# Altium PCB TFT_Adapter_Board_拼版.PcbDoc (part 2 of 9)
Units mm, origin at the board's own origin, x right, y up, seen from the top; angles counter-clockwise.
Board outline 137 x 166.56 mm, 2 copper layers (Top Layer, Bottom Layer); 80 components, 32 nets, 2615 pads, 0 vias.
Unrouted connection lines stored in the file: 1248.
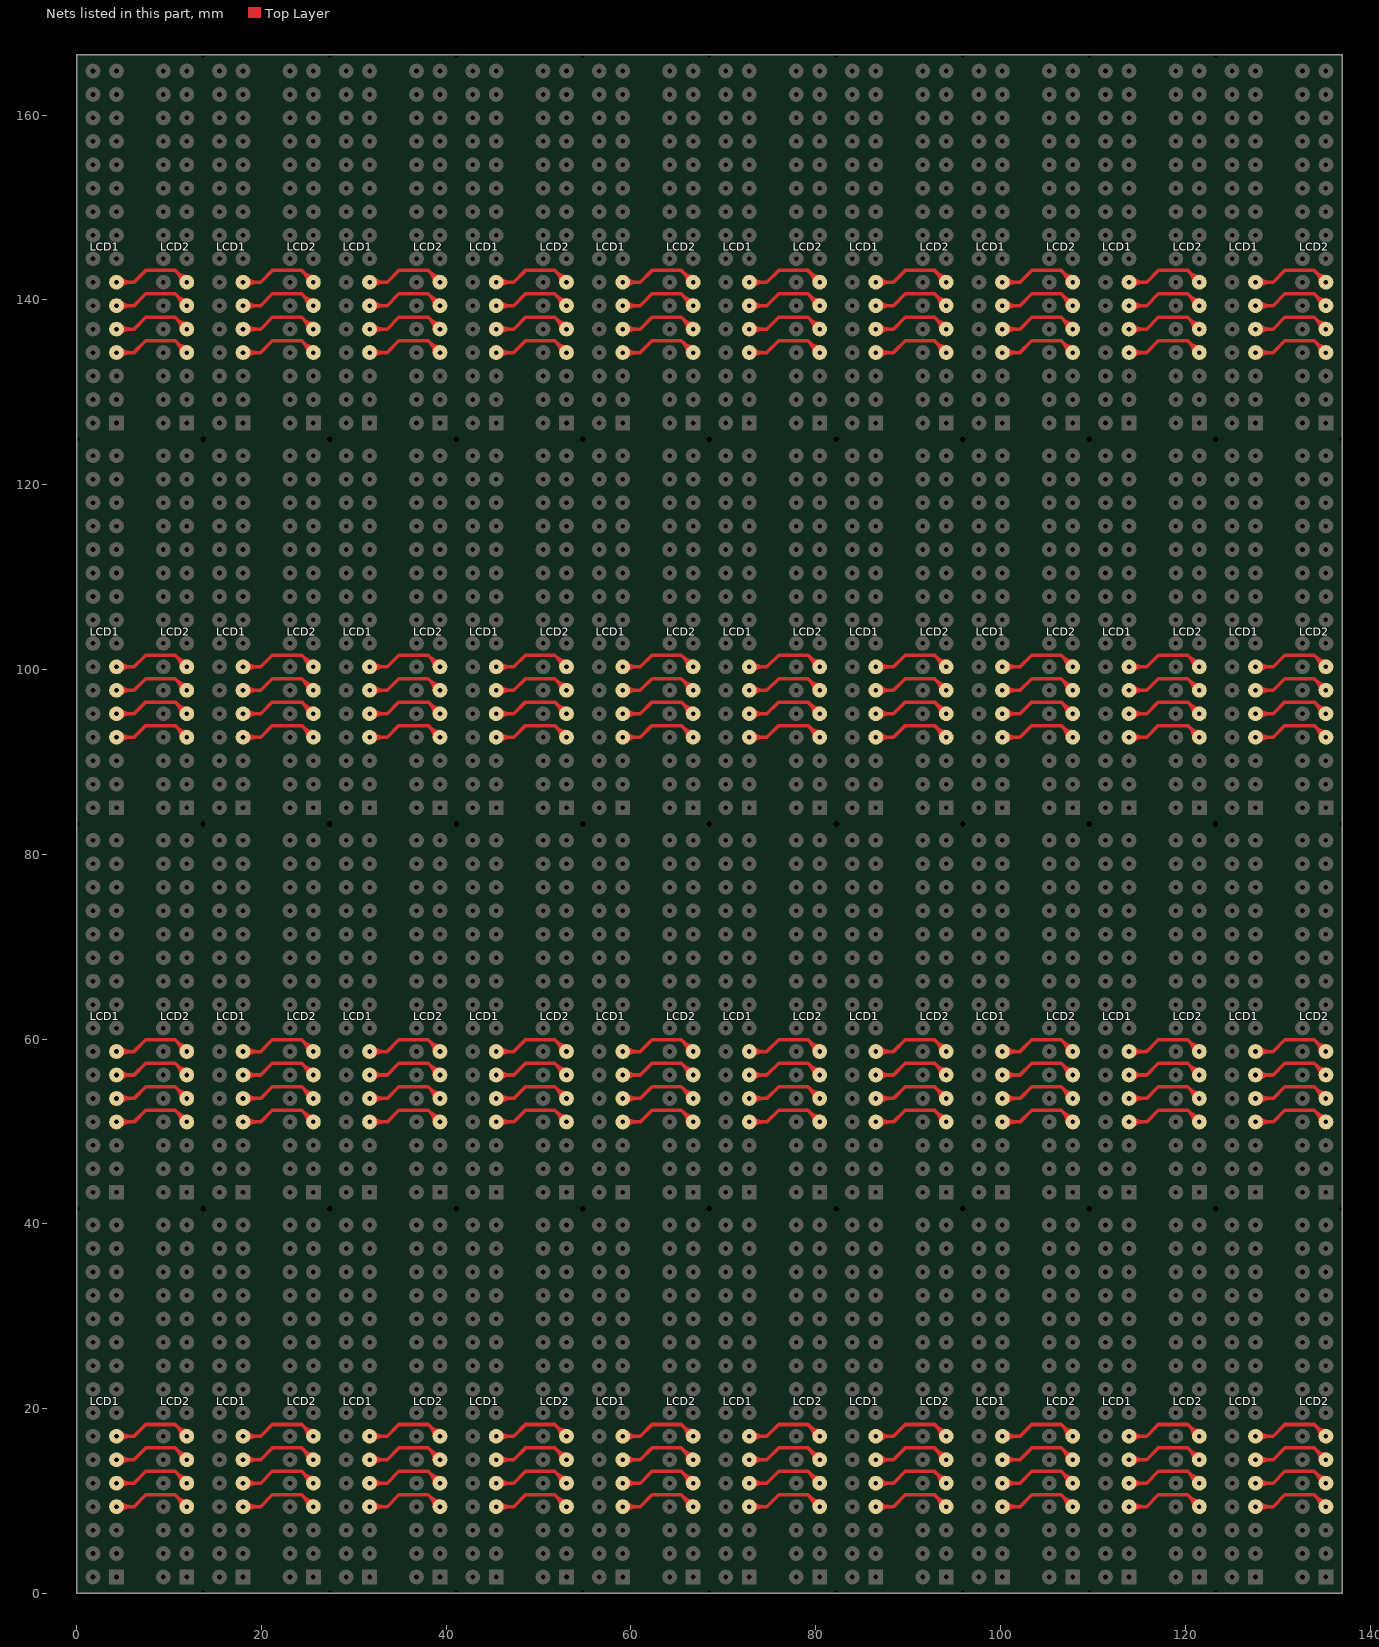
[diagram p2: the nets of this part, all layers, seen from the top]

## Nets (pads, with @x,y where several pads share a name; then routed paths per layer and width w, separated by ;. In a path a pad name is that pad's centre, name@x,y a point inside that pad or via, vN(x,y) a via of type N, cw(c..) or ccw(c..) an arc to the next point about the centre after c; other vN are vias at no path point) (continued)
NetLCD1_4: LCD1.4 LCD2.4 | length 531.8
  Top Layer w0.381: LCD1.4@4.31,9.39 6.215,9.39 7.485,10.66 10.66,10.66 LCD2.4@11.93,9.39 ; LCD1.4@4.31,51.03 6.215,51.03 7.485,52.3 10.66,52.3 LCD2.4@11.93,51.03 ; LCD1.4@4.31,92.67 6.215,92.67 7.485,93.94 10.66,93.94 LCD2.4@11.93,92.67 ; LCD1.4@4.31,134.31 6.215,134.31 7.485,135.58 10.66,135.58 LCD2.4@11.93,134.31 ; LCD1.4@4.741,8.959 cw(c5.781,7.919) 5.781,9.39 cw(c5.781,10.861) LCD1.4@4.741,9.821 ; LCD1.4@4.741,50.599 cw(c5.781,49.559) 5.781,51.03 cw(c5.781,52.501) LCD1.4@4.741,51.461 ; LCD1.4@4.741,92.239 cw(c5.781,91.199) 5.781,92.67 cw(c5.781,94.141) LCD1.4@4.741,93.101 ; LCD1.4@4.741,133.879 cw(c5.781,132.839) 5.781,134.31 cw(c5.781,135.781) LCD1.4@4.741,134.741 ; LCD2.4@11.321,9.39 ccw(c9.849,9.39) 10.89,10.43 ccw(c11.93,11.471) LCD2.4@11.93,9.999 ; LCD2.4@11.321,51.03 ccw(c9.849,51.03) 10.89,52.07 ccw(c11.93,53.111) LCD2.4@11.93,51.639 ; LCD2.4@11.321,92.67 ccw(c9.849,92.67) 10.89,93.71 ccw(c11.93,94.751) LCD2.4@11.93,93.279 ; LCD2.4@11.321,134.31 ccw(c9.849,134.31) 10.89,135.35 ccw(c11.93,136.391) LCD2.4@11.93,134.919 ; LCD1.4@18.01,9.39 19.915,9.39 21.185,10.66 24.36,10.66 LCD2.4@25.63,9.39 ; LCD1.4@18.01,51.03 19.915,51.03 21.185,52.3 24.36,52.3 LCD2.4@25.63,51.03 ; LCD1.4@18.01,92.67 19.915,92.67 21.185,93.94 24.36,93.94 LCD2.4@25.63,92.67 ; LCD1.4@18.01,134.31 19.915,134.31 21.185,135.58 24.36,135.58 LCD2.4@25.63,134.31 ; LCD1.4@18.441,8.959 cw(c19.481,7.919) 19.481,9.39 cw(c19.481,10.861) LCD1.4@18.441,9.821 ; LCD1.4@18.441,50.599 cw(c19.481,49.559) 19.481,51.03 cw(c19.481,52.501) LCD1.4@18.441,51.461 ; LCD1.4@18.441,92.239 cw(c19.481,91.199) 19.481,92.67 cw(c19.481,94.141) LCD1.4@18.441,93.101 ; LCD1.4@18.441,133.879 cw(c19.481,132.839) 19.481,134.31 cw(c19.481,135.781) LCD1.4@18.441,134.741 ; LCD2.4@25.02,9.39 ccw(c23.549,9.39) 24.59,10.43 ccw(c25.63,11.471) LCD2.4@25.63,9.999 ; LCD2.4@25.02,51.03 ccw(c23.549,51.03) 24.59,52.07 ccw(c25.63,53.111) LCD2.4@25.63,51.639 ; LCD2.4@25.02,92.67 ccw(c23.549,92.67) 24.59,93.71 ccw(c25.63,94.751) LCD2.4@25.63,93.279 ; LCD2.4@25.02,134.31 ccw(c23.549,134.31) 24.59,135.35 ccw(c25.63,136.391) LCD2.4@25.63,134.919 ; LCD1.4@31.71,9.39 33.615,9.39 34.885,10.66 38.06,10.66 LCD2.4@39.33,9.39 ; LCD1.4@31.71,51.03 33.615,51.03 34.885,52.3 38.06,52.3 LCD2.4@39.33,51.03 ; LCD1.4@31.71,92.67 33.615,92.67 34.885,93.94 38.06,93.94 LCD2.4@39.33,92.67 ; LCD1.4@31.71,134.31 33.615,134.31 34.885,135.58 38.06,135.58 LCD2.4@39.33,134.31 ; LCD1.4@32.141,8.959 cw(c33.181,7.919) 33.181,9.39 cw(c33.181,10.861) LCD1.4@32.141,9.821 ; LCD1.4@32.141,50.599 cw(c33.181,49.559) 33.181,51.03 cw(c33.181,52.501) LCD1.4@32.141,51.461 ; LCD1.4@32.141,92.239 cw(c33.181,91.199) 33.181,92.67 cw(c33.181,94.141) LCD1.4@32.141,93.101 ; LCD1.4@32.141,133.879 cw(c33.181,132.839) 33.181,134.31 cw(c33.181,135.781) LCD1.4@32.141,134.741 ; LCD2.4@38.72,9.39 ccw(c37.249,9.39) 38.29,10.43 ccw(c39.33,11.471) LCD2.4@39.33,9.999 ; LCD2.4@38.72,51.03 ccw(c37.249,51.03) 38.29,52.07 ccw(c39.33,53.111) LCD2.4@39.33,51.639 ; LCD2.4@38.72,92.67 ccw(c37.249,92.67) 38.29,93.71 ccw(c39.33,94.751) LCD2.4@39.33,93.279 ; LCD2.4@38.72,134.31 ccw(c37.249,134.31) 38.29,135.35 ccw(c39.33,136.391) LCD2.4@39.33,134.919 ; LCD1.4@45.41,9.39 47.315,9.39 48.585,10.66 51.76,10.66 LCD2.4@53.03,9.39 ; LCD1.4@45.41,51.03 47.315,51.03 48.585,52.3 51.76,52.3 LCD2.4@53.03,51.03 ; LCD1.4@45.41,92.67 47.315,92.67 48.585,93.94 51.76,93.94 LCD2.4@53.03,92.67 ; LCD1.4@45.41,134.31 47.315,134.31 48.585,135.58 51.76,135.58 LCD2.4@53.03,134.31 ; LCD1.4@45.841,8.959 cw(c46.881,7.919) 46.881,9.39 cw(c46.881,10.861) LCD1.4@45.841,9.821 ; LCD1.4@45.841,50.599 cw(c46.881,49.559) 46.881,51.03 cw(c46.881,52.501) LCD1.4@45.841,51.461 ; LCD1.4@45.841,92.239 cw(c46.881,91.199) 46.881,92.67 cw(c46.881,94.141) LCD1.4@45.841,93.101 ; LCD1.4@45.841,133.879 cw(c46.881,132.839) 46.881,134.31 cw(c46.881,135.781) LCD1.4@45.841,134.741 ; LCD2.4@52.42,9.39 ccw(c50.949,9.39) 51.99,10.43 ccw(c53.03,11.471) LCD2.4@53.03,9.999 ; LCD2.4@52.42,51.03 ccw(c50.949,51.03) 51.99,52.07 ccw(c53.03,53.111) LCD2.4@53.03,51.639 ; LCD2.4@52.42,92.67 ccw(c50.949,92.67) 51.99,93.71 ccw(c53.03,94.751) LCD2.4@53.03,93.279 ; LCD2.4@52.42,134.31 ccw(c50.949,134.31) 51.99,135.35 ccw(c53.03,136.391) LCD2.4@53.03,134.919 ; LCD1.4@59.11,9.39 61.015,9.39 62.285,10.66 65.46,10.66 LCD2.4@66.73,9.39 ; LCD1.4@59.11,51.03 61.015,51.03 62.285,52.3 65.46,52.3 LCD2.4@66.73,51.03 ; LCD1.4@59.11,92.67 61.015,92.67 62.285,93.94 65.46,93.94 LCD2.4@66.73,92.67 ; LCD1.4@59.11,134.31 61.015,134.31 62.285,135.58 65.46,135.58 LCD2.4@66.73,134.31 ; LCD1.4@59.541,8.959 cw(c60.581,7.919) 60.581,9.39 cw(c60.581,10.861) LCD1.4@59.541,9.821 ; LCD1.4@59.541,50.599 cw(c60.581,49.559) 60.581,51.03 cw(c60.581,52.501) LCD1.4@59.541,51.461 ; LCD1.4@59.541,92.239 cw(c60.581,91.199) 60.581,92.67 cw(c60.581,94.141) LCD1.4@59.541,93.101 ; LCD1.4@59.541,133.879 cw(c60.581,132.839) 60.581,134.31 cw(c60.581,135.781) LCD1.4@59.541,134.741 ; LCD2.4@66.12,9.39 ccw(c64.649,9.39) 65.69,10.43 ccw(c66.73,11.471) LCD2.4@66.73,9.999 ; LCD2.4@66.12,51.03 ccw(c64.649,51.03) 65.69,52.07 ccw(c66.73,53.111) LCD2.4@66.73,51.639 ; LCD2.4@66.12,92.67 ccw(c64.649,92.67) 65.69,93.71 ccw(c66.73,94.751) LCD2.4@66.73,93.279 ; LCD2.4@66.12,134.31 ccw(c64.649,134.31) 65.69,135.35 ccw(c66.73,136.391) LCD2.4@66.73,134.919 ; LCD1.4@72.81,9.39 74.715,9.39 75.985,10.66 79.16,10.66 LCD2.4@80.43,9.39 ; LCD1.4@72.81,51.03 74.715,51.03 75.985,52.3 79.16,52.3 LCD2.4@80.43,51.03 ; LCD1.4@72.81,92.67 74.715,92.67 75.985,93.94 79.16,93.94 LCD2.4@80.43,92.67 ; LCD1.4@72.81,134.31 74.715,134.31 75.985,135.58 79.16,135.58 LCD2.4@80.43,134.31 ; LCD1.4@73.241,8.959 cw(c74.281,7.919) 74.281,9.39 cw(c74.281,10.861) LCD1.4@73.241,9.821 ; LCD1.4@73.241,50.599 cw(c74.281,49.559) 74.281,51.03 cw(c74.281,52.501) LCD1.4@73.241,51.461 ; LCD1.4@73.241,92.239 cw(c74.281,91.199) 74.281,92.67 cw(c74.281,94.141) LCD1.4@73.241,93.101 ; LCD1.4@73.241,133.879 cw(c74.281,132.839) 74.281,134.31 cw(c74.281,135.781) LCD1.4@73.241,134.741 ; LCD2.4@79.82,9.39 ccw(c78.349,9.39) 79.39,10.43 ccw(c80.43,11.471) LCD2.4@80.43,9.999 ; LCD2.4@79.82,51.03 ccw(c78.349,51.03) 79.39,52.07 ccw(c80.43,53.111) LCD2.4@80.43,51.639 ; LCD2.4@79.82,92.67 ccw(c78.349,92.67) 79.39,93.71 ccw(c80.43,94.751) LCD2.4@80.43,93.279 ; LCD2.4@79.82,134.31 ccw(c78.349,134.31) 79.39,135.35 ccw(c80.43,136.391) LCD2.4@80.43,134.919 ; LCD1.4@86.51,9.39 88.415,9.39 89.685,10.66 92.86,10.66 LCD2.4@94.13,9.39 ; LCD1.4@86.51,51.03 88.415,51.03 89.685,52.3 92.86,52.3 LCD2.4@94.13,51.03 ; LCD1.4@86.51,92.67 88.415,92.67 89.685,93.94 92.86,93.94 LCD2.4@94.13,92.67 ; LCD1.4@86.51,134.31 88.415,134.31 89.685,135.58 92.86,135.58 LCD2.4@94.13,134.31 ; LCD1.4@86.941,8.959 cw(c87.981,7.919) 87.981,9.39 cw(c87.981,10.861) LCD1.4@86.941,9.821 ; LCD1.4@86.941,50.599 cw(c87.981,49.559) 87.981,51.03 cw(c87.981,52.501) LCD1.4@86.941,51.461 ; LCD1.4@86.941,92.239 cw(c87.981,91.199) 87.981,92.67 cw(c87.981,94.141) LCD1.4@86.941,93.101 ; LCD1.4@86.941,133.879 cw(c87.981,132.839) 87.981,134.31 cw(c87.981,135.781) LCD1.4@86.941,134.741 ; LCD2.4@93.52,9.39 ccw(c92.049,9.39) 93.09,10.43 ccw(c94.13,11.471) LCD2.4@94.13,9.999 ; LCD2.4@93.52,51.03 ccw(c92.049,51.03) 93.09,52.07 ccw(c94.13,53.111) LCD2.4@94.13,51.639 ; LCD2.4@93.52,92.67 ccw(c92.049,92.67) 93.09,93.71 ccw(c94.13,94.751) LCD2.4@94.13,93.279 ; LCD2.4@93.52,134.31 ccw(c92.049,134.31) 93.09,135.35 ccw(c94.13,136.391) LCD2.4@94.13,134.919 ; LCD1.4@100.21,9.39 102.115,9.39 103.385,10.66 106.56,10.66 LCD2.4@107.83,9.39 ; LCD1.4@100.21,51.03 102.115,51.03 103.385,52.3 106.56,52.3 LCD2.4@107.83,51.03 ; LCD1.4@100.21,92.67 102.115,92.67 103.385,93.94 106.56,93.94 LCD2.4@107.83,92.67 ; LCD1.4@100.21,134.31 102.115,134.31 103.385,135.58 106.56,135.58 LCD2.4@107.83,134.31 ; LCD1.4@100.641,8.959 cw(c101.681,7.919) 101.681,9.39 cw(c101.681,10.861) LCD1.4@100.641,9.821 ; LCD1.4@100.641,50.599 cw(c101.681,49.559) 101.681,51.03 cw(c101.681,52.501) LCD1.4@100.641,51.461 ; LCD1.4@100.641,92.239 cw(c101.681,91.199) 101.681,92.67 cw(c101.681,94.141) LCD1.4@100.641,93.101 ; LCD1.4@100.641,133.879 cw(c101.681,132.839) 101.681,134.31 cw(c101.681,135.781) LCD1.4@100.641,134.741 ; LCD2.4@107.22,9.39 ccw(c105.749,9.39) 106.79,10.43 ccw(c107.83,11.471) LCD2.4@107.83,9.999 ; LCD2.4@107.22,51.03 ccw(c105.749,51.03) 106.79,52.07 ccw(c107.83,53.111) LCD2.4@107.83,51.639 ; LCD2.4@107.22,92.67 ccw(c105.749,92.67) 106.79,93.71 ccw(c107.83,94.751) LCD2.4@107.83,93.279 ; LCD2.4@107.22,134.31 ccw(c105.749,134.31) 106.79,135.35 ccw(c107.83,136.391) LCD2.4@107.83,134.919 ; LCD1.4@113.91,9.39 115.815,9.39 117.085,10.66 120.26,10.66 LCD2.4@121.53,9.39 ; LCD1.4@113.91,51.03 115.815,51.03 117.085,52.3 120.26,52.3 LCD2.4@121.53,51.03 ; LCD1.4@113.91,92.67 115.815,92.67 117.085,93.94 120.26,93.94 LCD2.4@121.53,92.67 ; LCD1.4@113.91,134.31 115.815,134.31 117.085,135.58 120.26,135.58 LCD2.4@121.53,134.31 ; LCD1.4@114.341,8.959 cw(c115.381,7.919) 115.381,9.39 cw(c115.381,10.861) LCD1.4@114.341,9.821 ; LCD1.4@114.341,50.599 cw(c115.381,49.559) 115.381,51.03 cw(c115.381,52.501) LCD1.4@114.341,51.461 ; LCD1.4@114.341,92.239 cw(c115.381,91.199) 115.381,92.67 cw(c115.381,94.141) LCD1.4@114.341,93.101 ; LCD1.4@114.341,133.879 cw(c115.381,132.839) 115.381,134.31 cw(c115.381,135.781) LCD1.4@114.341,134.741 ; LCD2.4@120.92,9.39 ccw(c119.449,9.39) 120.49,10.43 ccw(c121.53,11.471) LCD2.4@121.53,9.999 ; LCD2.4@120.92,51.03 ccw(c119.449,51.03) 120.49,52.07 ccw(c121.53,53.111) LCD2.4@121.53,51.639 ; LCD2.4@120.92,92.67 ccw(c119.449,92.67) 120.49,93.71 ccw(c121.53,94.751) LCD2.4@121.53,93.279 ; LCD2.4@120.92,134.31 ccw(c119.449,134.31) 120.49,135.35 ccw(c121.53,136.391) LCD2.4@121.53,134.919 ; LCD1.4@127.61,9.39 129.515,9.39 130.785,10.66 133.96,10.66 LCD2.4@135.23,9.39 ; LCD1.4@127.61,51.03 129.515,51.03 130.785,52.3 133.96,52.3 LCD2.4@135.23,51.03 ; LCD1.4@127.61,92.67 129.515,92.67 130.785,93.94 133.96,93.94 LCD2.4@135.23,92.67 ; LCD1.4@127.61,134.31 129.515,134.31 130.785,135.58 133.96,135.58 LCD2.4@135.23,134.31 ; LCD1.4@128.041,8.959 cw(c129.081,7.919) 129.081,9.39 cw(c129.081,10.861) LCD1.4@128.041,9.821 ; LCD1.4@128.041,50.599 cw(c129.081,49.559) 129.081,51.03 cw(c129.081,52.501) LCD1.4@128.041,51.461 ; LCD1.4@128.041,92.239 cw(c129.081,91.199) 129.081,92.67 cw(c129.081,94.141) LCD1.4@128.041,93.101 ; LCD1.4@128.041,133.879 cw(c129.081,132.839) 129.081,134.31 cw(c129.081,135.781) LCD1.4@128.041,134.741 ; LCD2.4@134.62,9.39 ccw(c133.149,9.39) 134.19,10.43 ccw(c135.23,11.471) LCD2.4@135.23,9.999 ; LCD2.4@134.62,51.03 ccw(c133.149,51.03) 134.19,52.07 ccw(c135.23,53.111) LCD2.4@135.23,51.639 ; LCD2.4@134.62,92.67 ccw(c133.149,92.67) 134.19,93.71 ccw(c135.23,94.751) LCD2.4@135.23,93.279 ; LCD2.4@134.62,134.31 ccw(c133.149,134.31) 134.19,135.35 ccw(c135.23,136.391) LCD2.4@135.23,134.919
NetLCD1_5: LCD1.5 LCD2.5 | length 531.8
  Top Layer w0.381: LCD1.5@4.31,11.93 6.215,11.93 7.485,13.2 10.66,13.2 LCD2.5@11.93,11.93 ; LCD1.5@4.31,53.57 6.215,53.57 7.485,54.84 10.66,54.84 LCD2.5@11.93,53.57 ; LCD1.5@4.31,95.21 6.215,95.21 7.485,96.48 10.66,96.48 LCD2.5@11.93,95.21 ; LCD1.5@4.31,136.85 6.215,136.85 7.485,138.12 10.66,138.12 LCD2.5@11.93,136.85 ; LCD1.5@4.741,11.499 cw(c5.781,10.459) 5.781,11.93 cw(c5.781,13.401) LCD1.5@4.741,12.361 ; LCD1.5@4.741,53.139 cw(c5.781,52.099) 5.781,53.57 cw(c5.781,55.041) LCD1.5@4.741,54.001 ; LCD1.5@4.741,94.779 cw(c5.781,93.739) 5.781,95.21 cw(c5.781,96.681) LCD1.5@4.741,95.641 ; LCD1.5@4.741,136.419 cw(c5.781,135.379) 5.781,136.85 cw(c5.781,138.321) LCD1.5@4.741,137.281 ; LCD2.5@11.321,11.93 ccw(c9.849,11.93) 10.89,12.97 ccw(c11.93,14.011) LCD2.5@11.93,12.539 ; LCD2.5@11.321,53.57 ccw(c9.849,53.57) 10.89,54.61 ccw(c11.93,55.651) LCD2.5@11.93,54.179 ; LCD2.5@11.321,95.21 ccw(c9.849,95.21) 10.89,96.25 ccw(c11.93,97.291) LCD2.5@11.93,95.819 ; LCD2.5@11.321,136.85 ccw(c9.849,136.85) 10.89,137.89 ccw(c11.93,138.931) LCD2.5@11.93,137.459 ; LCD1.5@18.01,11.93 19.915,11.93 21.185,13.2 24.36,13.2 LCD2.5@25.63,11.93 ; LCD1.5@18.01,53.57 19.915,53.57 21.185,54.84 24.36,54.84 LCD2.5@25.63,53.57 ; LCD1.5@18.01,95.21 19.915,95.21 21.185,96.48 24.36,96.48 LCD2.5@25.63,95.21 ; LCD1.5@18.01,136.85 19.915,136.85 21.185,138.12 24.36,138.12 LCD2.5@25.63,136.85 ; LCD1.5@18.441,11.499 cw(c19.481,10.459) 19.481,11.93 cw(c19.481,13.401) LCD1.5@18.441,12.361 ; LCD1.5@18.441,53.139 cw(c19.481,52.099) 19.481,53.57 cw(c19.481,55.041) LCD1.5@18.441,54.001 ; LCD1.5@18.441,94.779 cw(c19.481,93.739) 19.481,95.21 cw(c19.481,96.681) LCD1.5@18.441,95.641 ; LCD1.5@18.441,136.419 cw(c19.481,135.379) 19.481,136.85 cw(c19.481,138.321) LCD1.5@18.441,137.281 ; LCD2.5@25.02,11.93 ccw(c23.549,11.93) 24.59,12.97 ccw(c25.63,14.011) LCD2.5@25.63,12.539 ; LCD2.5@25.02,53.57 ccw(c23.549,53.57) 24.59,54.61 ccw(c25.63,55.651) LCD2.5@25.63,54.179 ; LCD2.5@25.02,95.21 ccw(c23.549,95.21) 24.59,96.25 ccw(c25.63,97.291) LCD2.5@25.63,95.819 ; LCD2.5@25.02,136.85 ccw(c23.549,136.85) 24.59,137.89 ccw(c25.63,138.931) LCD2.5@25.63,137.459 ; LCD1.5@31.71,11.93 33.615,11.93 34.885,13.2 38.06,13.2 LCD2.5@39.33,11.93 ; LCD1.5@31.71,53.57 33.615,53.57 34.885,54.84 38.06,54.84 LCD2.5@39.33,53.57 ; LCD1.5@31.71,95.21 33.615,95.21 34.885,96.48 38.06,96.48 LCD2.5@39.33,95.21 ; LCD1.5@31.71,136.85 33.615,136.85 34.885,138.12 38.06,138.12 LCD2.5@39.33,136.85 ; LCD1.5@32.141,11.499 cw(c33.181,10.459) 33.181,11.93 cw(c33.181,13.401) LCD1.5@32.141,12.361 ; LCD1.5@32.141,53.139 cw(c33.181,52.099) 33.181,53.57 cw(c33.181,55.041) LCD1.5@32.141,54.001 ; LCD1.5@32.141,94.779 cw(c33.181,93.739) 33.181,95.21 cw(c33.181,96.681) LCD1.5@32.141,95.641 ; LCD1.5@32.141,136.419 cw(c33.181,135.379) 33.181,136.85 cw(c33.181,138.321) LCD1.5@32.141,137.281 ; LCD2.5@38.72,11.93 ccw(c37.249,11.93) 38.29,12.97 ccw(c39.33,14.011) LCD2.5@39.33,12.539 ; LCD2.5@38.72,53.57 ccw(c37.249,53.57) 38.29,54.61 ccw(c39.33,55.651) LCD2.5@39.33,54.179 ; LCD2.5@38.72,95.21 ccw(c37.249,95.21) 38.29,96.25 ccw(c39.33,97.291) LCD2.5@39.33,95.819 ; LCD2.5@38.72,136.85 ccw(c37.249,136.85) 38.29,137.89 ccw(c39.33,138.931) LCD2.5@39.33,137.459 ; LCD1.5@45.41,11.93 47.315,11.93 48.585,13.2 51.76,13.2 LCD2.5@53.03,11.93 ; LCD1.5@45.41,53.57 47.315,53.57 48.585,54.84 51.76,54.84 LCD2.5@53.03,53.57 ; LCD1.5@45.41,95.21 47.315,95.21 48.585,96.48 51.76,96.48 LCD2.5@53.03,95.21 ; LCD1.5@45.41,136.85 47.315,136.85 48.585,138.12 51.76,138.12 LCD2.5@53.03,136.85 ; LCD1.5@45.841,11.499 cw(c46.881,10.459) 46.881,11.93 cw(c46.881,13.401) LCD1.5@45.841,12.361 ; LCD1.5@45.841,53.139 cw(c46.881,52.099) 46.881,53.57 cw(c46.881,55.041) LCD1.5@45.841,54.001 ; LCD1.5@45.841,94.779 cw(c46.881,93.739) 46.881,95.21 cw(c46.881,96.681) LCD1.5@45.841,95.641 ; LCD1.5@45.841,136.419 cw(c46.881,135.379) 46.881,136.85 cw(c46.881,138.321) LCD1.5@45.841,137.281 ; LCD2.5@52.42,11.93 ccw(c50.949,11.93) 51.99,12.97 ccw(c53.03,14.011) LCD2.5@53.03,12.539 ; LCD2.5@52.42,53.57 ccw(c50.949,53.57) 51.99,54.61 ccw(c53.03,55.651) LCD2.5@53.03,54.179 ; LCD2.5@52.42,95.21 ccw(c50.949,95.21) 51.99,96.25 ccw(c53.03,97.291) LCD2.5@53.03,95.819 ; LCD2.5@52.42,136.85 ccw(c50.949,136.85) 51.99,137.89 ccw(c53.03,138.931) LCD2.5@53.03,137.459 ; LCD1.5@59.11,11.93 61.015,11.93 62.285,13.2 65.46,13.2 LCD2.5@66.73,11.93 ; LCD1.5@59.11,53.57 61.015,53.57 62.285,54.84 65.46,54.84 LCD2.5@66.73,53.57 ; LCD1.5@59.11,95.21 61.015,95.21 62.285,96.48 65.46,96.48 LCD2.5@66.73,95.21 ; LCD1.5@59.11,136.85 61.015,136.85 62.285,138.12 65.46,138.12 LCD2.5@66.73,136.85 ; LCD1.5@59.541,11.499 cw(c60.581,10.459) 60.581,11.93 cw(c60.581,13.401) LCD1.5@59.541,12.361 ; LCD1.5@59.541,53.139 cw(c60.581,52.099) 60.581,53.57 cw(c60.581,55.041) LCD1.5@59.541,54.001 ; LCD1.5@59.541,94.779 cw(c60.581,93.739) 60.581,95.21 cw(c60.581,96.681) LCD1.5@59.541,95.641 ; LCD1.5@59.541,136.419 cw(c60.581,135.379) 60.581,136.85 cw(c60.581,138.321) LCD1.5@59.541,137.281 ; LCD2.5@66.12,11.93 ccw(c64.649,11.93) 65.69,12.97 ccw(c66.73,14.011) LCD2.5@66.73,12.539 ; LCD2.5@66.12,53.57 ccw(c64.649,53.57) 65.69,54.61 ccw(c66.73,55.651) LCD2.5@66.73,54.179 ; LCD2.5@66.12,95.21 ccw(c64.649,95.21) 65.69,96.25 ccw(c66.73,97.291) LCD2.5@66.73,95.819 ; LCD2.5@66.12,136.85 ccw(c64.649,136.85) 65.69,137.89 ccw(c66.73,138.931) LCD2.5@66.73,137.459 ; LCD1.5@72.81,11.93 74.715,11.93 75.985,13.2 79.16,13.2 LCD2.5@80.43,11.93 ; LCD1.5@72.81,53.57 74.715,53.57 75.985,54.84 79.16,54.84 LCD2.5@80.43,53.57 ; LCD1.5@72.81,95.21 74.715,95.21 75.985,96.48 79.16,96.48 LCD2.5@80.43,95.21 ; LCD1.5@72.81,136.85 74.715,136.85 75.985,138.12 79.16,138.12 LCD2.5@80.43,136.85 ; LCD1.5@73.241,11.499 cw(c74.281,10.459) 74.281,11.93 cw(c74.281,13.401) LCD1.5@73.241,12.361 ; LCD1.5@73.241,53.139 cw(c74.281,52.099) 74.281,53.57 cw(c74.281,55.041) LCD1.5@73.241,54.001 ; LCD1.5@73.241,94.779 cw(c74.281,93.739) 74.281,95.21 cw(c74.281,96.681) LCD1.5@73.241,95.641 ; LCD1.5@73.241,136.419 cw(c74.281,135.379) 74.281,136.85 cw(c74.281,138.321) LCD1.5@73.241,137.281 ; LCD2.5@79.82,11.93 ccw(c78.349,11.93) 79.39,12.97 ccw(c80.43,14.011) LCD2.5@80.43,12.539 ; LCD2.5@79.82,53.57 ccw(c78.349,53.57) 79.39,54.61 ccw(c80.43,55.651) LCD2.5@80.43,54.179 ; LCD2.5@79.82,95.21 ccw(c78.349,95.21) 79.39,96.25 ccw(c80.43,97.291) LCD2.5@80.43,95.819 ; LCD2.5@79.82,136.85 ccw(c78.349,136.85) 79.39,137.89 ccw(c80.43,138.931) LCD2.5@80.43,137.459 ; LCD1.5@86.51,11.93 88.415,11.93 89.685,13.2 92.86,13.2 LCD2.5@94.13,11.93 ; LCD1.5@86.51,53.57 88.415,53.57 89.685,54.84 92.86,54.84 LCD2.5@94.13,53.57 ; LCD1.5@86.51,95.21 88.415,95.21 89.685,96.48 92.86,96.48 LCD2.5@94.13,95.21 ; LCD1.5@86.51,136.85 88.415,136.85 89.685,138.12 92.86,138.12 LCD2.5@94.13,136.85 ; LCD1.5@86.941,11.499 cw(c87.981,10.459) 87.981,11.93 cw(c87.981,13.401) LCD1.5@86.941,12.361 ; LCD1.5@86.941,53.139 cw(c87.981,52.099) 87.981,53.57 cw(c87.981,55.041) LCD1.5@86.941,54.001 ; LCD1.5@86.941,94.779 cw(c87.981,93.739) 87.981,95.21 cw(c87.981,96.681) LCD1.5@86.941,95.641 ; LCD1.5@86.941,136.419 cw(c87.981,135.379) 87.981,136.85 cw(c87.981,138.321) LCD1.5@86.941,137.281 ; LCD2.5@93.52,11.93 ccw(c92.049,11.93) 93.09,12.97 ccw(c94.13,14.011) LCD2.5@94.13,12.539 ; LCD2.5@93.52,53.57 ccw(c92.049,53.57) 93.09,54.61 ccw(c94.13,55.651) LCD2.5@94.13,54.179 ; LCD2.5@93.52,95.21 ccw(c92.049,95.21) 93.09,96.25 ccw(c94.13,97.291) LCD2.5@94.13,95.819 ; LCD2.5@93.52,136.85 ccw(c92.049,136.85) 93.09,137.89 ccw(c94.13,138.931) LCD2.5@94.13,137.459 ; LCD1.5@100.21,11.93 102.115,11.93 103.385,13.2 106.56,13.2 LCD2.5@107.83,11.93 ; LCD1.5@100.21,53.57 102.115,53.57 103.385,54.84 106.56,54.84 LCD2.5@107.83,53.57 ; LCD1.5@100.21,95.21 102.115,95.21 103.385,96.48 106.56,96.48 LCD2.5@107.83,95.21 ; LCD1.5@100.21,136.85 102.115,136.85 103.385,138.12 106.56,138.12 LCD2.5@107.83,136.85 ; LCD1.5@100.641,11.499 cw(c101.681,10.459) 101.681,11.93 cw(c101.681,13.401) LCD1.5@100.641,12.361 ; LCD1.5@100.641,53.139 cw(c101.681,52.099) 101.681,53.57 cw(c101.681,55.041) LCD1.5@100.641,54.001 ; LCD1.5@100.641,94.779 cw(c101.681,93.739) 101.681,95.21 cw(c101.681,96.681) LCD1.5@100.641,95.641 ; LCD1.5@100.641,136.419 cw(c101.681,135.379) 101.681,136.85 cw(c101.681,138.321) LCD1.5@100.641,137.281 ; LCD2.5@107.22,11.93 ccw(c105.749,11.93) 106.79,12.97 ccw(c107.83,14.011) LCD2.5@107.83,12.539 ; LCD2.5@107.22,53.57 ccw(c105.749,53.57) 106.79,54.61 ccw(c107.83,55.651) LCD2.5@107.83,54.179 ; LCD2.5@107.22,95.21 ccw(c105.749,95.21) 106.79,96.25 ccw(c107.83,97.291) LCD2.5@107.83,95.819 ; LCD2.5@107.22,136.85 ccw(c105.749,136.85) 106.79,137.89 ccw(c107.83,138.931) LCD2.5@107.83,137.459 ; LCD1.5@113.91,11.93 115.815,11.93 117.085,13.2 120.26,13.2 LCD2.5@121.53,11.93 ; LCD1.5@113.91,53.57 115.815,53.57 117.085,54.84 120.26,54.84 LCD2.5@121.53,53.57 ; LCD1.5@113.91,95.21 115.815,95.21 117.085,96.48 120.26,96.48 LCD2.5@121.53,95.21 ; LCD1.5@113.91,136.85 115.815,136.85 117.085,138.12 120.26,138.12 LCD2.5@121.53,136.85 ; LCD1.5@114.341,11.499 cw(c115.381,10.459) 115.381,11.93 cw(c115.381,13.401) LCD1.5@114.341,12.361 ; LCD1.5@114.341,53.139 cw(c115.381,52.099) 115.381,53.57 cw(c115.381,55.041) LCD1.5@114.341,54.001 ; LCD1.5@114.341,94.779 cw(c115.381,93.739) 115.381,95.21 cw(c115.381,96.681) LCD1.5@114.341,95.641 ; LCD1.5@114.341,136.419 cw(c115.381,135.379) 115.381,136.85 cw(c115.381,138.321) LCD1.5@114.341,137.281 ; LCD2.5@120.92,11.93 ccw(c119.449,11.93) 120.49,12.97 ccw(c121.53,14.011) LCD2.5@121.53,12.539 ; LCD2.5@120.92,53.57 ccw(c119.449,53.57) 120.49,54.61 ccw(c121.53,55.651) LCD2.5@121.53,54.179 ; LCD2.5@120.92,95.21 ccw(c119.449,95.21) 120.49,96.25 ccw(c121.53,97.291) LCD2.5@121.53,95.819 ; LCD2.5@120.92,136.85 ccw(c119.449,136.85) 120.49,137.89 ccw(c121.53,138.931) LCD2.5@121.53,137.459 ; LCD1.5@127.61,11.93 129.515,11.93 130.785,13.2 133.96,13.2 LCD2.5@135.23,11.93 ; LCD1.5@127.61,53.57 129.515,53.57 130.785,54.84 133.96,54.84 LCD2.5@135.23,53.57 ; LCD1.5@127.61,95.21 129.515,95.21 130.785,96.48 133.96,96.48 LCD2.5@135.23,95.21 ; LCD1.5@127.61,136.85 129.515,136.85 130.785,138.12 133.96,138.12 LCD2.5@135.23,136.85 ; LCD1.5@128.041,11.499 cw(c129.081,10.459) 129.081,11.93 cw(c129.081,13.401) LCD1.5@128.041,12.361 ; LCD1.5@128.041,53.139 cw(c129.081,52.099) 129.081,53.57 cw(c129.081,55.041) LCD1.5@128.041,54.001 ; LCD1.5@128.041,94.779 cw(c129.081,93.739) 129.081,95.21 cw(c129.081,96.681) LCD1.5@128.041,95.641 ; LCD1.5@128.041,136.419 cw(c129.081,135.379) 129.081,136.85 cw(c129.081,138.321) LCD1.5@128.041,137.281 ; LCD2.5@134.62,11.93 ccw(c133.149,11.93) 134.19,12.97 ccw(c135.23,14.011) LCD2.5@135.23,12.539 ; LCD2.5@134.62,53.57 ccw(c133.149,53.57) 134.19,54.61 ccw(c135.23,55.651) LCD2.5@135.23,54.179 ; LCD2.5@134.62,95.21 ccw(c133.149,95.21) 134.19,96.25 ccw(c135.23,97.291) LCD2.5@135.23,95.819 ; LCD2.5@134.62,136.85 ccw(c133.149,136.85) 134.19,137.89 ccw(c135.23,138.931) LCD2.5@135.23,137.459
NetLCD1_6: LCD1.6 LCD2.6 | length 531.8
  Top Layer w0.381: LCD1.6@4.31,14.47 6.215,14.47 7.485,15.74 10.66,15.74 LCD2.6@11.93,14.47 ; LCD1.6@4.31,56.11 6.215,56.11 7.485,57.38 10.66,57.38 LCD2.6@11.93,56.11 ; LCD1.6@4.31,97.75 6.215,97.75 7.485,99.02 10.66,99.02 LCD2.6@11.93,97.75 ; LCD1.6@4.31,139.39 6.215,139.39 7.485,140.66 10.66,140.66 LCD2.6@11.93,139.39 ; LCD1.6@4.741,14.039 cw(c5.781,12.999) 5.781,14.47 cw(c5.781,15.941) LCD1.6@4.741,14.901 ; LCD1.6@4.741,55.679 cw(c5.781,54.639) 5.781,56.11 cw(c5.781,57.581) LCD1.6@4.741,56.541 ; LCD1.6@4.741,97.319 cw(c5.781,96.279) 5.781,97.75 cw(c5.781,99.221) LCD1.6@4.741,98.181 ; LCD1.6@4.741,138.959 cw(c5.781,137.919) 5.781,139.39 cw(c5.781,140.861) LCD1.6@4.741,139.821 ; LCD2.6@11.321,14.47 ccw(c9.849,14.47) 10.89,15.51 ccw(c11.93,16.551) LCD2.6@11.93,15.079 ; LCD2.6@11.321,56.11 ccw(c9.849,56.11) 10.89,57.15 ccw(c11.93,58.191) LCD2.6@11.93,56.719 ; LCD2.6@11.321,97.75 ccw(c9.849,97.75) 10.89,98.79 ccw(c11.93,99.831) LCD2.6@11.93,98.359 ; LCD2.6@11.321,139.39 ccw(c9.849,139.39) 10.89,140.43 ccw(c11.93,141.471) LCD2.6@11.93,139.999 ; LCD1.6@18.01,14.47 19.915,14.47 21.185,15.74 24.36,15.74 LCD2.6@25.63,14.47 ; LCD1.6@18.01,56.11 19.915,56.11 21.185,57.38 24.36,57.38 LCD2.6@25.63,56.11 ; LCD1.6@18.01,97.75 19.915,97.75 21.185,99.02 24.36,99.02 LCD2.6@25.63,97.75 ; LCD1.6@18.01,139.39 19.915,139.39 21.185,140.66 24.36,140.66 LCD2.6@25.63,139.39 ; LCD1.6@18.441,14.039 cw(c19.481,12.999) 19.481,14.47 cw(c19.481,15.941) LCD1.6@18.441,14.901 ; LCD1.6@18.441,55.679 cw(c19.481,54.639) 19.481,56.11 cw(c19.481,57.581) LCD1.6@18.441,56.541 ; LCD1.6@18.441,97.319 cw(c19.481,96.279) 19.481,97.75 cw(c19.481,99.221) LCD1.6@18.441,98.181 ; LCD1.6@18.441,138.959 cw(c19.481,137.919) 19.481,139.39 cw(c19.481,140.861) LCD1.6@18.441,139.821 ; LCD2.6@25.02,14.47 ccw(c23.549,14.47) 24.59,15.51 ccw(c25.63,16.551) LCD2.6@25.63,15.079 ; LCD2.6@25.02,56.11 ccw(c23.549,56.11) 24.59,57.15 ccw(c25.63,58.191) LCD2.6@25.63,56.719 ; LCD2.6@25.02,97.75 ccw(c23.549,97.75) 24.59,98.79 ccw(c25.63,99.831) LCD2.6@25.63,98.359 ; LCD2.6@25.02,139.39 ccw(c23.549,139.39) 24.59,140.43 ccw(c25.63,141.471) LCD2.6@25.63,139.999 ; LCD1.6@31.71,14.47 33.615,14.47 34.885,15.74 38.06,15.74 LCD2.6@39.33,14.47 ; LCD1.6@31.71,56.11 33.615,56.11 34.885,57.38 38.06,57.38 LCD2.6@39.33,56.11 ; LCD1.6@31.71,97.75 33.615,97.75 34.885,99.02 38.06,99.02 LCD2.6@39.33,97.75 ; LCD1.6@31.71,139.39 33.615,139.39 34.885,140.66 38.06,140.66 LCD2.6@39.33,139.39 ; LCD1.6@32.141,14.039 cw(c33.181,12.999) 33.181,14.47 cw(c33.181,15.941) LCD1.6@32.141,14.901 ; LCD1.6@32.141,55.679 cw(c33.181,54.639) 33.181,56.11 cw(c33.181,57.581) LCD1.6@32.141,56.541 ; LCD1.6@32.141,97.319 cw(c33.181,96.279) 33.181,97.75 cw(c33.181,99.221) LCD1.6@32.141,98.181 ; LCD1.6@32.141,138.959 cw(c33.181,137.919) 33.181,139.39 cw(c33.181,140.861) LCD1.6@32.141,139.821 ; LCD2.6@38.72,14.47 ccw(c37.249,14.47) 38.29,15.51 ccw(c39.33,16.551) LCD2.6@39.33,15.079 ; LCD2.6@38.72,56.11 ccw(c37.249,56.11) 38.29,57.15 ccw(c39.33,58.191) LCD2.6@39.33,56.719 ; LCD2.6@38.72,97.75 ccw(c37.249,97.75) 38.29,98.79 ccw(c39.33,99.831) LCD2.6@39.33,98.359 ; LCD2.6@38.72,139.39 ccw(c37.249,139.39) 38.29,140.43 ccw(c39.33,141.471) LCD2.6@39.33,139.999 ; LCD1.6@45.41,14.47 47.315,14.47 48.585,15.74 51.76,15.74 LCD2.6@53.03,14.47 ; LCD1.6@45.41,56.11 47.315,56.11 48.585,57.38 51.76,57.38 LCD2.6@53.03,56.11 ; LCD1.6@45.41,97.75 47.315,97.75 48.585,99.02 51.76,99.02 LCD2.6@53.03,97.75 ; LCD1.6@45.41,139.39 47.315,139.39 48.585,140.66 51.76,140.66 LCD2.6@53.03,139.39 ; LCD1.6@45.841,14.039 cw(c46.881,12.999) 46.881,14.47 cw(c46.881,15.941) LCD1.6@45.841,14.901 ; LCD1.6@45.841,55.679 cw(c46.881,54.639) 46.881,56.11 cw(c46.881,57.581) LCD1.6@45.841,56.541 ; LCD1.6@45.841,97.319 cw(c46.881,96.279) 46.881,97.75 cw(c46.881,99.221) LCD1.6@45.841,98.181 ; LCD1.6@45.841,138.959 cw(c46.881,137.919) 46.881,139.39 cw(c46.881,140.861) LCD1.6@45.841,139.821 ; LCD2.6@52.42,14.47 ccw(c50.949,14.47) 51.99,15.51 ccw(c53.03,16.551) LCD2.6@53.03,15.079 ; LCD2.6@52.42,56.11 ccw(c50.949,56.11) 51.99,57.15 ccw(c53.03,58.191) LCD2.6@53.03,56.719 ; LCD2.6@52.42,97.75 ccw(c50.949,97.75) 51.99,98.79 ccw(c53.03,99.831) LCD2.6@53.03,98.359 ; LCD2.6@52.42,139.39 ccw(c50.949,139.39) 51.99,140.43 ccw(c53.03,141.471) LCD2.6@53.03,139.999 ; LCD1.6@59.11,14.47 61.015,14.47 62.285,15.74 65.46,15.74 LCD2.6@66.73,14.47 ; LCD1.6@59.11,56.11 61.015,56.11 62.285,57.38 65.46,57.38 LCD2.6@66.73,56.11 ; LCD1.6@59.11,97.75 61.015,97.75 62.285,99.02 65.46,99.02 LCD2.6@66.73,97.75 ; LCD1.6@59.11,139.39 61.015,139.39 62.285,140.66 65.46,140.66 LCD2.6@66.73,139.39 ; LCD1.6@59.541,14.039 cw(c60.581,12.999) 60.581,14.47 cw(c60.581,15.941) LCD1.6@59.541,14.901 ; LCD1.6@59.541,55.679 cw(c60.581,54.639) 60.581,56.11 cw(c60.581,57.581) LCD1.6@59.541,56.541 ; LCD1.6@59.541,97.319 cw(c60.581,96.279) 60.581,97.75 cw(c60.581,99.221) LCD1.6@59.541,98.181 ; LCD1.6@59.541,138.959 cw(c60.581,137.919) 60.581,139.39 cw(c60.581,140.861) LCD1.6@59.541,139.821 ; LCD2.6@66.12,14.47 ccw(c64.649,14.47) 65.69,15.51 ccw(c66.73,16.551) LCD2.6@66.73,15.079 ; LCD2.6@66.12,56.11 ccw(c64.649,56.11) 65.69,57.15 ccw(c66.73,58.191) LCD2.6@66.73,56.719 ; LCD2.6@66.12,97.75 ccw(c64.649,97.75) 65.69,98.79 ccw(c66.73,99.831) LCD2.6@66.73,98.359 ; LCD2.6@66.12,139.39 ccw(c64.649,139.39) 65.69,140.43 ccw(c66.73,141.471) LCD2.6@66.73,139.999 ; LCD1.6@72.81,14.47 74.715,14.47 75.985,15.74 79.16,15.74 LCD2.6@80.43,14.47 ; LCD1.6@72.81,56.11 74.715,56.11 75.985,57.38 79.16,57.38 LCD2.6@80.43,56.11 ; LCD1.6@72.81,97.75 74.715,97.75 75.985,99.02 79.16,99.02 LCD2.6@80.43,97.75 ; LCD1.6@72.81,139.39 74.715,139.39 75.985,140.66 79.16,140.66 LCD2.6@80.43,139.39 ; LCD1.6@73.241,14.039 cw(c74.281,12.999) 74.281,14.47 cw(c74.281,15.941) LCD1.6@73.241,14.901 ; LCD1.6@73.241,55.679 cw(c74.281,54.639) 74.281,56.11 cw(c74.281,57.581) LCD1.6@73.241,56.541 ; LCD1.6@73.241,97.319 cw(c74.281,96.279) 74.281,97.75 cw(c74.281,99.221) LCD1.6@73.241,98.181 ; LCD1.6@73.241,138.959 cw(c74.281,137.919) 74.281,139.39 cw(c74.281,140.861) LCD1.6@73.241,139.821 ; LCD2.6@79.82,14.47 ccw(c78.349,14.47) 79.39,15.51 ccw(c80.43,16.551) LCD2.6@80.43,15.079 ; LCD2.6@79.82,56.11 ccw(c78.349,56.11) 79.39,57.15 ccw(c80.43,58.191) LCD2.6@80.43,56.719 ; LCD2.6@79.82,97.75 ccw(c78.349,97.75) 79.39,98.79 ccw(c80.43,99.831) LCD2.6@80.43,98.359 ; LCD2.6@79.82,139.39 ccw(c78.349,139.39) 79.39,140.43 ccw(c80.43,141.471) LCD2.6@80.43,139.999 ; LCD1.6@86.51,14.47 88.415,14.47 89.685,15.74 92.86,15.74 LCD2.6@94.13,14.47 ; LCD1.6@86.51,56.11 88.415,56.11 89.685,57.38 92.86,57.38 LCD2.6@94.13,56.11 ; LCD1.6@86.51,97.75 88.415,97.75 89.685,99.02 92.86,99.02 LCD2.6@94.13,97.75 ; LCD1.6@86.51,139.39 88.415,139.39 89.685,140.66 92.86,140.66 LCD2.6@94.13,139.39 ; LCD1.6@86.941,14.039 cw(c87.981,12.999) 87.981,14.47 cw(c87.981,15.941) LCD1.6@86.941,14.901 ; LCD1.6@86.941,55.679 cw(c87.981,54.639) 87.981,56.11 cw(c87.981,57.581) LCD1.6@86.941,56.541 ; LCD1.6@86.941,97.319 cw(c87.981,96.279) 87.981,97.75 cw(c87.981,99.221) LCD1.6@86.941,98.181 ; LCD1.6@86.941,138.959 cw(c87.981,137.919) 87.981,139.39 cw(c87.981,140.861) LCD1.6@86.941,139.821 ; LCD2.6@93.52,14.47 ccw(c92.049,14.47) 93.09,15.51 ccw(c94.13,16.551) LCD2.6@94.13,15.079 ; LCD2.6@93.52,56.11 ccw(c92.049,56.11) 93.09,57.15 ccw(c94.13,58.191) LCD2.6@94.13,56.719 ; LCD2.6@93.52,97.75 ccw(c92.049,97.75) 93.09,98.79 ccw(c94.13,99.831) LCD2.6@94.13,98.359 ; LCD2.6@93.52,139.39 ccw(c92.049,139.39) 93.09,140.43 ccw(c94.13,141.471) LCD2.6@94.13,139.999 ; LCD1.6@100.21,14.47 102.115,14.47 103.385,15.74 106.56,15.74 LCD2.6@107.83,14.47 ; LCD1.6@100.21,56.11 102.115,56.11 103.385,57.38 106.56,57.38 LCD2.6@107.83,56.11 ; LCD1.6@100.21,97.75 102.115,97.75 103.385,99.02 106.56,99.02 LCD2.6@107.83,97.75 ; LCD1.6@100.21,139.39 102.115,139.39 103.385,140.66 106.56,140.66 LCD2.6@107.83,139.39 ; LCD1.6@100.641,14.039 cw(c101.681,12.999) 101.681,14.47 cw(c101.681,15.941) LCD1.6@100.641,14.901 ; LCD1.6@100.641,55.679 cw(c101.681,54.639) 101.681,56.11 cw(c101.681,57.581) LCD1.6@100.641,56.541 ; LCD1.6@100.641,97.319 cw(c101.681,96.279) 101.681,97.75 cw(c101.681,99.221) LCD1.6@100.641,98.181 ; LCD1.6@100.641,138.959 cw(c101.681,137.919) 101.681,139.39 cw(c101.681,140.861) LCD1.6@100.641,139.821 ; LCD2.6@107.22,14.47 ccw(c105.749,14.47) 106.79,15.51 ccw(c107.83,16.551) LCD2.6@107.83,15.079 ; LCD2.6@107.22,56.11 ccw(c105.749,56.11) 106.79,57.15 ccw(c107.83,58.191) LCD2.6@107.83,56.719 ; LCD2.6@107.22,97.75 ccw(c105.749,97.75) 106.79,98.79 ccw(c107.83,99.831) LCD2.6@107.83,98.359 ; LCD2.6@107.22,139.39 ccw(c105.749,139.39) 106.79,140.43 ccw(c107.83,141.471) LCD2.6@107.83,139.999 ; LCD1.6@113.91,14.47 115.815,14.47 117.085,15.74 120.26,15.74 LCD2.6@121.53,14.47 ; LCD1.6@113.91,56.11 115.815,56.11 117.085,57.38 120.26,57.38 LCD2.6@121.53,56.11 ; LCD1.6@113.91,97.75 115.815,97.75 117.085,99.02 120.26,99.02 LCD2.6@121.53,97.75 ; LCD1.6@113.91,139.39 115.815,139.39 117.085,140.66 120.26,140.66 LCD2.6@121.53,139.39 ; LCD1.6@114.341,14.039 cw(c115.381,12.999) 115.381,14.47 cw(c115.381,15.941) LCD1.6@114.341,14.901 ; LCD1.6@114.341,55.679 cw(c115.381,54.639) 115.381,56.11 cw(c115.381,57.581) LCD1.6@114.341,56.541 ; LCD1.6@114.341,97.319 cw(c115.381,96.279) 115.381,97.75 cw(c115.381,99.221) LCD1.6@114.341,98.181 ; LCD1.6@114.341,138.959 cw(c115.381,137.919) 115.381,139.39 cw(c115.381,140.861) LCD1.6@114.341,139.821 ; LCD2.6@120.92,14.47 ccw(c119.449,14.47) 120.49,15.51 ccw(c121.53,16.551) LCD2.6@121.53,15.079 ; LCD2.6@120.92,56.11 ccw(c119.449,56.11) 120.49,57.15 ccw(c121.53,58.191) LCD2.6@121.53,56.719 ; LCD2.6@120.92,97.75 ccw(c119.449,97.75) 120.49,98.79 ccw(c121.53,99.831) LCD2.6@121.53,98.359 ; LCD2.6@120.92,139.39 ccw(c119.449,139.39) 120.49,140.43 ccw(c121.53,141.471) LCD2.6@121.53,139.999 ; LCD1.6@127.61,14.47 129.515,14.47 130.785,15.74 133.96,15.74 LCD2.6@135.23,14.47 ; LCD1.6@127.61,56.11 129.515,56.11 130.785,57.38 133.96,57.38 LCD2.6@135.23,56.11 ; LCD1.6@127.61,97.75 129.515,97.75 130.785,99.02 133.96,99.02 LCD2.6@135.23,97.75 ; LCD1.6@127.61,139.39 129.515,139.39 130.785,140.66 133.96,140.66 LCD2.6@135.23,139.39 ; LCD1.6@128.041,14.039 cw(c129.081,12.999) 129.081,14.47 cw(c129.081,15.941) LCD1.6@128.041,14.901 ; LCD1.6@128.041,55.679 cw(c129.081,54.639) 129.081,56.11 cw(c129.081,57.581) LCD1.6@128.041,56.541 ; LCD1.6@128.041,97.319 cw(c129.081,96.279) 129.081,97.75 cw(c129.081,99.221) LCD1.6@128.041,98.181 ; LCD1.6@128.041,138.959 cw(c129.081,137.919) 129.081,139.39 cw(c129.081,140.861) LCD1.6@128.041,139.821 ; LCD2.6@134.62,14.47 ccw(c133.149,14.47) 134.19,15.51 ccw(c135.23,16.551) LCD2.6@135.23,15.079 ; LCD2.6@134.62,56.11 ccw(c133.149,56.11) 134.19,57.15 ccw(c135.23,58.191) LCD2.6@135.23,56.719 ; LCD2.6@134.62,97.75 ccw(c133.149,97.75) 134.19,98.79 ccw(c135.23,99.831) LCD2.6@135.23,98.359 ; LCD2.6@134.62,139.39 ccw(c133.149,139.39) 134.19,140.43 ccw(c135.23,141.471) LCD2.6@135.23,139.999
NetLCD1_7: LCD1.7 LCD2.7 | length 531.8
  Top Layer w0.381: LCD1.7@4.31,17.01 6.215,17.01 7.485,18.28 10.66,18.28 LCD2.7@11.93,17.01 ; LCD1.7@4.31,58.65 6.215,58.65 7.485,59.92 10.66,59.92 LCD2.7@11.93,58.65 ; LCD1.7@4.31,100.29 6.215,100.29 7.485,101.56 10.66,101.56 LCD2.7@11.93,100.29 ; LCD1.7@4.31,141.93 6.215,141.93 7.485,143.2 10.66,143.2 LCD2.7@11.93,141.93 ; LCD1.7@4.741,16.579 cw(c5.781,15.539) 5.781,17.01 cw(c5.781,18.481) LCD1.7@4.741,17.441 ; LCD1.7@4.741,58.219 cw(c5.781,57.179) 5.781,58.65 cw(c5.781,60.121) LCD1.7@4.741,59.081 ; LCD1.7@4.741,99.859 cw(c5.781,98.819) 5.781,100.29 cw(c5.781,101.761) LCD1.7@4.741,100.721 ; LCD1.7@4.741,141.499 cw(c5.781,140.459) 5.781,141.93 cw(c5.781,143.401) LCD1.7@4.741,142.361 ; LCD2.7@11.321,17.01 ccw(c9.849,17.01) 10.89,18.05 ccw(c11.93,19.091) LCD2.7@11.93,17.619 ; LCD2.7@11.321,58.65 ccw(c9.849,58.65) 10.89,59.69 ccw(c11.93,60.731) LCD2.7@11.93,59.259 ; LCD2.7@11.321,100.29 ccw(c9.849,100.29) 10.89,101.33 ccw(c11.93,102.371) LCD2.7@11.93,100.899 ; LCD2.7@11.321,141.93 ccw(c9.849,141.93) 10.89,142.97 ccw(c11.93,144.011) LCD2.7@11.93,142.539 ; LCD1.7@18.01,17.01 19.915,17.01 21.185,18.28 24.36,18.28 LCD2.7@25.63,17.01 ; LCD1.7@18.01,58.65 19.915,58.65 21.185,59.92 24.36,59.92 LCD2.7@25.63,58.65 ; LCD1.7@18.01,100.29 19.915,100.29 21.185,101.56 24.36,101.56 LCD2.7@25.63,100.29 ; LCD1.7@18.01,141.93 19.915,141.93 21.185,143.2 24.36,143.2 LCD2.7@25.63,141.93 ; LCD1.7@18.441,16.579 cw(c19.481,15.539) 19.481,17.01 cw(c19.481,18.481) LCD1.7@18.441,17.441 ; LCD1.7@18.441,58.219 cw(c19.481,57.179) 19.481,58.65 cw(c19.481,60.121) LCD1.7@18.441,59.081 ; LCD1.7@18.441,99.859 cw(c19.481,98.819) 19.481,100.29 cw(c19.481,101.761) LCD1.7@18.441,100.721 ; LCD1.7@18.441,141.499 cw(c19.481,140.459) 19.481,141.93 cw(c19.481,143.401) LCD1.7@18.441,142.361 ; LCD2.7@25.02,17.01 ccw(c23.549,17.01) 24.59,18.05 ccw(c25.63,19.091) LCD2.7@25.63,17.619 ; LCD2.7@25.02,58.65 ccw(c23.549,58.65) 24.59,59.69 ccw(c25.63,60.731) LCD2.7@25.63,59.259 ; LCD2.7@25.02,100.29 ccw(c23.549,100.29) 24.59,101.33 ccw(c25.63,102.371) LCD2.7@25.63,100.899 ; LCD2.7@25.02,141.93 ccw(c23.549,141.93) 24.59,142.97 ccw(c25.63,144.011) LCD2.7@25.63,142.539 ; LCD1.7@31.71,17.01 33.615,17.01 34.885,18.28 38.06,18.28 LCD2.7@39.33,17.01 ; LCD1.7@31.71,58.65 33.615,58.65 34.885,59.92 38.06,59.92 LCD2.7@39.33,58.65 ; LCD1.7@31.71,100.29 33.615,100.29 34.885,101.56 38.06,101.56 LCD2.7@39.33,100.29 ; LCD1.7@31.71,141.93 33.615,141.93 34.885,143.2 38.06,143.2 LCD2.7@39.33,141.93 ; LCD1.7@32.141,16.579 cw(c33.181,15.539) 33.181,17.01 cw(c33.181,18.481) LCD1.7@32.141,17.441 ; LCD1.7@32.141,58.219 cw(c33.181,57.179) 33.181,58.65 cw(c33.181,60.121) LCD1.7@32.141,59.081 ; LCD1.7@32.141,99.859 cw(c33.181,98.819) 33.181,100.29 cw(c33.181,101.761) LCD1.7@32.141,100.721 ; LCD1.7@32.141,141.499 cw(c33.181,140.459) 33.181,141.93 cw(c33.181,143.401) LCD1.7@32.141,142.361 ; LCD2.7@38.72,17.01 ccw(c37.249,17.01) 38.29,18.05 ccw(c39.33,19.091) LCD2.7@39.33,17.619 ; LCD2.7@38.72,58.65 ccw(c37.249,58.65) 38.29,59.69 ccw(c39.33,60.731) LCD2.7@39.33,59.259 ; LCD2.7@38.72,100.29 ccw(c37.249,100.29) 38.29,101.33 ccw(c39.33,102.371) LCD2.7@39.33,100.899 ; LCD2.7@38.72,141.93 ccw(c37.249,141.93) 38.29,142.97 ccw(c39.33,144.011) LCD2.7@39.33,142.539 ; LCD1.7@45.41,17.01 47.315,17.01 48.585,18.28 51.76,18.28 LCD2.7@53.03,17.01 ; LCD1.7@45.41,58.65 47.315,58.65 48.585,59.92 51.76,59.92 LCD2.7@53.03,58.65 ; LCD1.7@45.41,100.29 47.315,100.29 48.585,101.56 51.76,101.56 LCD2.7@53.03,100.29 ; LCD1.7@45.41,141.93 47.315,141.93 48.585,143.2 51.76,143.2 LCD2.7@53.03,141.93 ; LCD1.7@45.841,16.579 cw(c46.881,15.539) 46.881,17.01 cw(c46.881,18.481) LCD1.7@45.841,17.441 ; LCD1.7@45.841,58.219 cw(c46.881,57.179) 46.881,58.65 cw(c46.881,60.121) LCD1.7@45.841,59.081 ; LCD1.7@45.841,99.859 cw(c46.881,98.819) 46.881,100.29 cw(c46.881,101.761) LCD1.7@45.841,100.721 ; LCD1.7@45.841,141.499 cw(c46.881,140.459) 46.881,141.93 cw(c46.881,143.401) LCD1.7@45.841,142.361 ; LCD2.7@52.42,17.01 ccw(c50.949,17.01) 51.99,18.05 ccw(c53.03,19.091) LCD2.7@53.03,17.619 ; LCD2.7@52.42,58.65 ccw(c50.949,58.65) 51.99,59.69 ccw(c53.03,60.731) LCD2.7@53.03,59.259 ; LCD2.7@52.42,100.29 ccw(c50.949,100.29) 51.99,101.33 ccw(c53.03,102.371) LCD2.7@53.03,100.899 ; LCD2.7@52.42,141.93 ccw(c50.949,141.93) 51.99,142.97 ccw(c53.03,144.011) LCD2.7@53.03,142.539 ; LCD1.7@59.11,17.01 61.015,17.01 62.285,18.28 65.46,18.28 LCD2.7@66.73,17.01 ; LCD1.7@59.11,58.65 61.015,58.65 62.285,59.92 65.46,59.92 LCD2.7@66.73,58.65 ; LCD1.7@59.11,100.29 61.015,100.29 62.285,101.56 65.46,101.56 LCD2.7@66.73,100.29 ; LCD1.7@59.11,141.93 61.015,141.93 62.285,143.2 65.46,143.2 LCD2.7@66.73,141.93 ; LCD1.7@59.541,16.579 cw(c60.581,15.539) 60.581,17.01 cw(c60.581,18.481) LCD1.7@59.541,17.441 ; LCD1.7@59.541,58.219 cw(c60.581,57.179) 60.581,58.65 cw(c60.581,60.121) LCD1.7@59.541,59.081 ; LCD1.7@59.541,99.859 cw(c60.581,98.819) 60.581,100.29 cw(c60.581,101.761) LCD1.7@59.541,100.721 ; LCD1.7@59.541,141.499 cw(c60.581,140.459) 60.581,141.93 cw(c60.581,143.401) LCD1.7@59.541,142.361 ; LCD2.7@66.12,17.01 ccw(c64.649,17.01) 65.69,18.05 ccw(c66.73,19.091) LCD2.7@66.73,17.619 ; LCD2.7@66.12,58.65 ccw(c64.649,58.65) 65.69,59.69 ccw(c66.73,60.731) LCD2.7@66.73,59.259 ; LCD2.7@66.12,100.29 ccw(c64.649,100.29) 65.69,101.33 ccw(c66.73,102.371) LCD2.7@66.73,100.899 ; LCD2.7@66.12,141.93 ccw(c64.649,141.93) 65.69,142.97 ccw(c66.73,144.011) LCD2.7@66.73,142.539 ; LCD1.7@72.81,17.01 74.715,17.01 75.985,18.28 79.16,18.28 LCD2.7@80.43,17.01 ; LCD1.7@72.81,58.65 74.715,58.65 75.985,59.92 79.16,59.92 LCD2.7@80.43,58.65 ; LCD1.7@72.81,100.29 74.715,100.29 75.985,101.56 79.16,101.56 LCD2.7@80.43,100.29 ; LCD1.7@72.81,141.93 74.715,141.93 75.985,143.2 79.16,143.2 LCD2.7@80.43,141.93 ; LCD1.7@73.241,16.579 cw(c74.281,15.539) 74.281,17.01 cw(c74.281,18.481) LCD1.7@73.241,17.441 ; LCD1.7@73.241,58.219 cw(c74.281,57.179) 74.281,58.65 cw(c74.281,60.121) LCD1.7@73.241,59.081 ; LCD1.7@73.241,99.859 cw(c74.281,98.819) 74.281,100.29 cw(c74.281,101.761) LCD1.7@73.241,100.721 ; LCD1.7@73.241,141.499 cw(c74.281,140.459) 74.281,141.93 cw(c74.281,143.401) LCD1.7@73.241,142.361 ; LCD2.7@79.82,17.01 ccw(c78.349,17.01) 79.39,18.05 ccw(c80.43,19.091) LCD2.7@80.43,17.619 ; LCD2.7@79.82,58.65 ccw(c78.349,58.65) 79.39,59.69 ccw(c80.43,60.731) LCD2.7@80.43,59.259 ; LCD2.7@79.82,100.29 ccw(c78.349,100.29) 79.39,101.33 ccw(c80.43,102.371) LCD2.7@80.43,100.899 ; LCD2.7@79.82,141.93 ccw(c78.349,141.93) 79.39,142.97 ccw(c80.43,144.011) LCD2.7@80.43,142.539 ; LCD1.7@86.51,17.01 88.415,17.01 89.685,18.28 92.86,18.28 LCD2.7@94.13,17.01 ; LCD1.7@86.51,58.65 88.415,58.65 89.685,59.92 92.86,59.92 LCD2.7@94.13,58.65 ; LCD1.7@86.51,100.29 88.415,100.29 89.685,101.56 92.86,101.56 LCD2.7@94.13,100.29 ; LCD1.7@86.51,141.93 88.415,141.93 89.685,143.2 92.86,143.2 LCD2.7@94.13,141.93 ; LCD1.7@86.941,16.579 cw(c87.981,15.539) 87.981,17.01 cw(c87.981,18.481) LCD1.7@86.941,17.441 ; LCD1.7@86.941,58.219 cw(c87.981,57.179) 87.981,58.65 cw(c87.981,60.121) LCD1.7@86.941,59.081 ; LCD1.7@86.941,99.859 cw(c87.981,98.819) 87.981,100.29 cw(c87.981,101.761) LCD1.7@86.941,100.721 ; LCD1.7@86.941,141.499 cw(c87.981,140.459) 87.981,141.93 cw(c87.981,143.401) LCD1.7@86.941,142.361 ; LCD2.7@93.52,17.01 ccw(c92.049,17.01) 93.09,18.05 ccw(c94.13,19.091) LCD2.7@94.13,17.619 ; LCD2.7@93.52,58.65 ccw(c92.049,58.65) 93.09,59.69 ccw(c94.13,60.731) LCD2.7@94.13,59.259 ; LCD2.7@93.52,100.29 ccw(c92.049,100.29) 93.09,101.33 ccw(c94.13,102.371) LCD2.7@94.13,100.899 ; LCD2.7@93.52,141.93 ccw(c92.049,141.93) 93.09,142.97 ccw(c94.13,144.011) LCD2.7@94.13,142.539 ; LCD1.7@100.21,17.01 102.115,17.01 103.385,18.28 106.56,18.28 LCD2.7@107.83,17.01 ; LCD1.7@100.21,58.65 102.115,58.65 103.385,59.92 106.56,59.92 LCD2.7@107.83,58.65 ; LCD1.7@100.21,100.29 102.115,100.29 103.385,101.56 106.56,101.56 LCD2.7@107.83,100.29 ; LCD1.7@100.21,141.93 102.115,141.93 103.385,143.2 106.56,143.2 LCD2.7@107.83,141.93 ; LCD1.7@100.641,16.579 cw(c101.681,15.539) 101.681,17.01 cw(c101.681,18.481) LCD1.7@100.641,17.441 ; LCD1.7@100.641,58.219 cw(c101.681,57.179) 101.681,58.65 cw(c101.681,60.121) LCD1.7@100.641,59.081 ; LCD1.7@100.641,99.859 cw(c101.681,98.819) 101.681,100.29 cw(c101.681,101.761) LCD1.7@100.641,100.721 ; LCD1.7@100.641,141.499 cw(c101.681,140.459) 101.681,141.93 cw(c101.681,143.401) LCD1.7@100.641,142.361 ; LCD2.7@107.22,17.01 ccw(c105.749,17.01) 106.79,18.05 ccw(c107.83,19.091) LCD2.7@107.83,17.619 ; LCD2.7@107.22,58.65 ccw(c105.749,58.65) 106.79,59.69 ccw(c107.83,60.731) LCD2.7@107.83,59.259 ; LCD2.7@107.22,100.29 ccw(c105.749,100.29) 106.79,101.33 ccw(c107.83,102.371) LCD2.7@107.83,100.899 ; LCD2.7@107.22,141.93 ccw(c105.749,141.93) 106.79,142.97 ccw(c107.83,144.011) LCD2.7@107.83,142.539 ; LCD1.7@113.91,17.01 115.815,17.01 117.085,18.28 120.26,18.28 LCD2.7@121.53,17.01 ; LCD1.7@113.91,58.65 115.815,58.65 117.085,59.92 120.26,59.92 LCD2.7@121.53,58.65 ; LCD1.7@113.91,100.29 115.815,100.29 117.085,101.56 120.26,101.56 LCD2.7@121.53,100.29 ; LCD1.7@113.91,141.93 115.815,141.93 117.085,143.2 120.26,143.2 LCD2.7@121.53,141.93 ; LCD1.7@114.341,16.579 cw(c115.381,15.539) 115.381,17.01 cw(c115.381,18.481) LCD1.7@114.341,17.441 ; LCD1.7@114.341,58.219 cw(c115.381,57.179) 115.381,58.65 cw(c115.381,60.121) LCD1.7@114.341,59.081 ; LCD1.7@114.341,99.859 cw(c115.381,98.819) 115.381,100.29 cw(c115.381,101.761) LCD1.7@114.341,100.721 ; LCD1.7@114.341,141.499 cw(c115.381,140.459) 115.381,141.93 cw(c115.381,143.401) LCD1.7@114.341,142.361 ; LCD2.7@120.92,17.01 ccw(c119.449,17.01) 120.49,18.05 ccw(c121.53,19.091) LCD2.7@121.53,17.619 ; LCD2.7@120.92,58.65 ccw(c119.449,58.65) 120.49,59.69 ccw(c121.53,60.731) LCD2.7@121.53,59.259 ; LCD2.7@120.92,100.29 ccw(c119.449,100.29) 120.49,101.33 ccw(c121.53,102.371) LCD2.7@121.53,100.899 ; LCD2.7@120.92,141.93 ccw(c119.449,141.93) 120.49,142.97 ccw(c121.53,144.011) LCD2.7@121.53,142.539 ; LCD1.7@127.61,17.01 129.515,17.01 130.785,18.28 133.96,18.28 LCD2.7@135.23,17.01 ; LCD1.7@127.61,58.65 129.515,58.65 130.785,59.92 133.96,59.92 LCD2.7@135.23,58.65 ; LCD1.7@127.61,100.29 129.515,100.29 130.785,101.56 133.96,101.56 LCD2.7@135.23,100.29 ; LCD1.7@127.61,141.93 129.515,141.93 130.785,143.2 133.96,143.2 LCD2.7@135.23,141.93 ; LCD1.7@128.041,16.579 cw(c129.081,15.539) 129.081,17.01 cw(c129.081,18.481) LCD1.7@128.041,17.441 ; LCD1.7@128.041,58.219 cw(c129.081,57.179) 129.081,58.65 cw(c129.081,60.121) LCD1.7@128.041,59.081 ; LCD1.7@128.041,99.859 cw(c129.081,98.819) 129.081,100.29 cw(c129.081,101.761) LCD1.7@128.041,100.721 ; LCD1.7@128.041,141.499 cw(c129.081,140.459) 129.081,141.93 cw(c129.081,143.401) LCD1.7@128.041,142.361 ; LCD2.7@134.62,17.01 ccw(c133.149,17.01) 134.19,18.05 ccw(c135.23,19.091) LCD2.7@135.23,17.619 ; LCD2.7@134.62,58.65 ccw(c133.149,58.65) 134.19,59.69 ccw(c135.23,60.731) LCD2.7@135.23,59.259 ; LCD2.7@134.62,100.29 ccw(c133.149,100.29) 134.19,101.33 ccw(c135.23,102.371) LCD2.7@135.23,100.899 ; LCD2.7@134.62,141.93 ccw(c133.149,141.93) 134.19,142.97 ccw(c135.23,144.011) LCD2.7@135.23,142.539